# Allegro board fpga_pci_card.brd
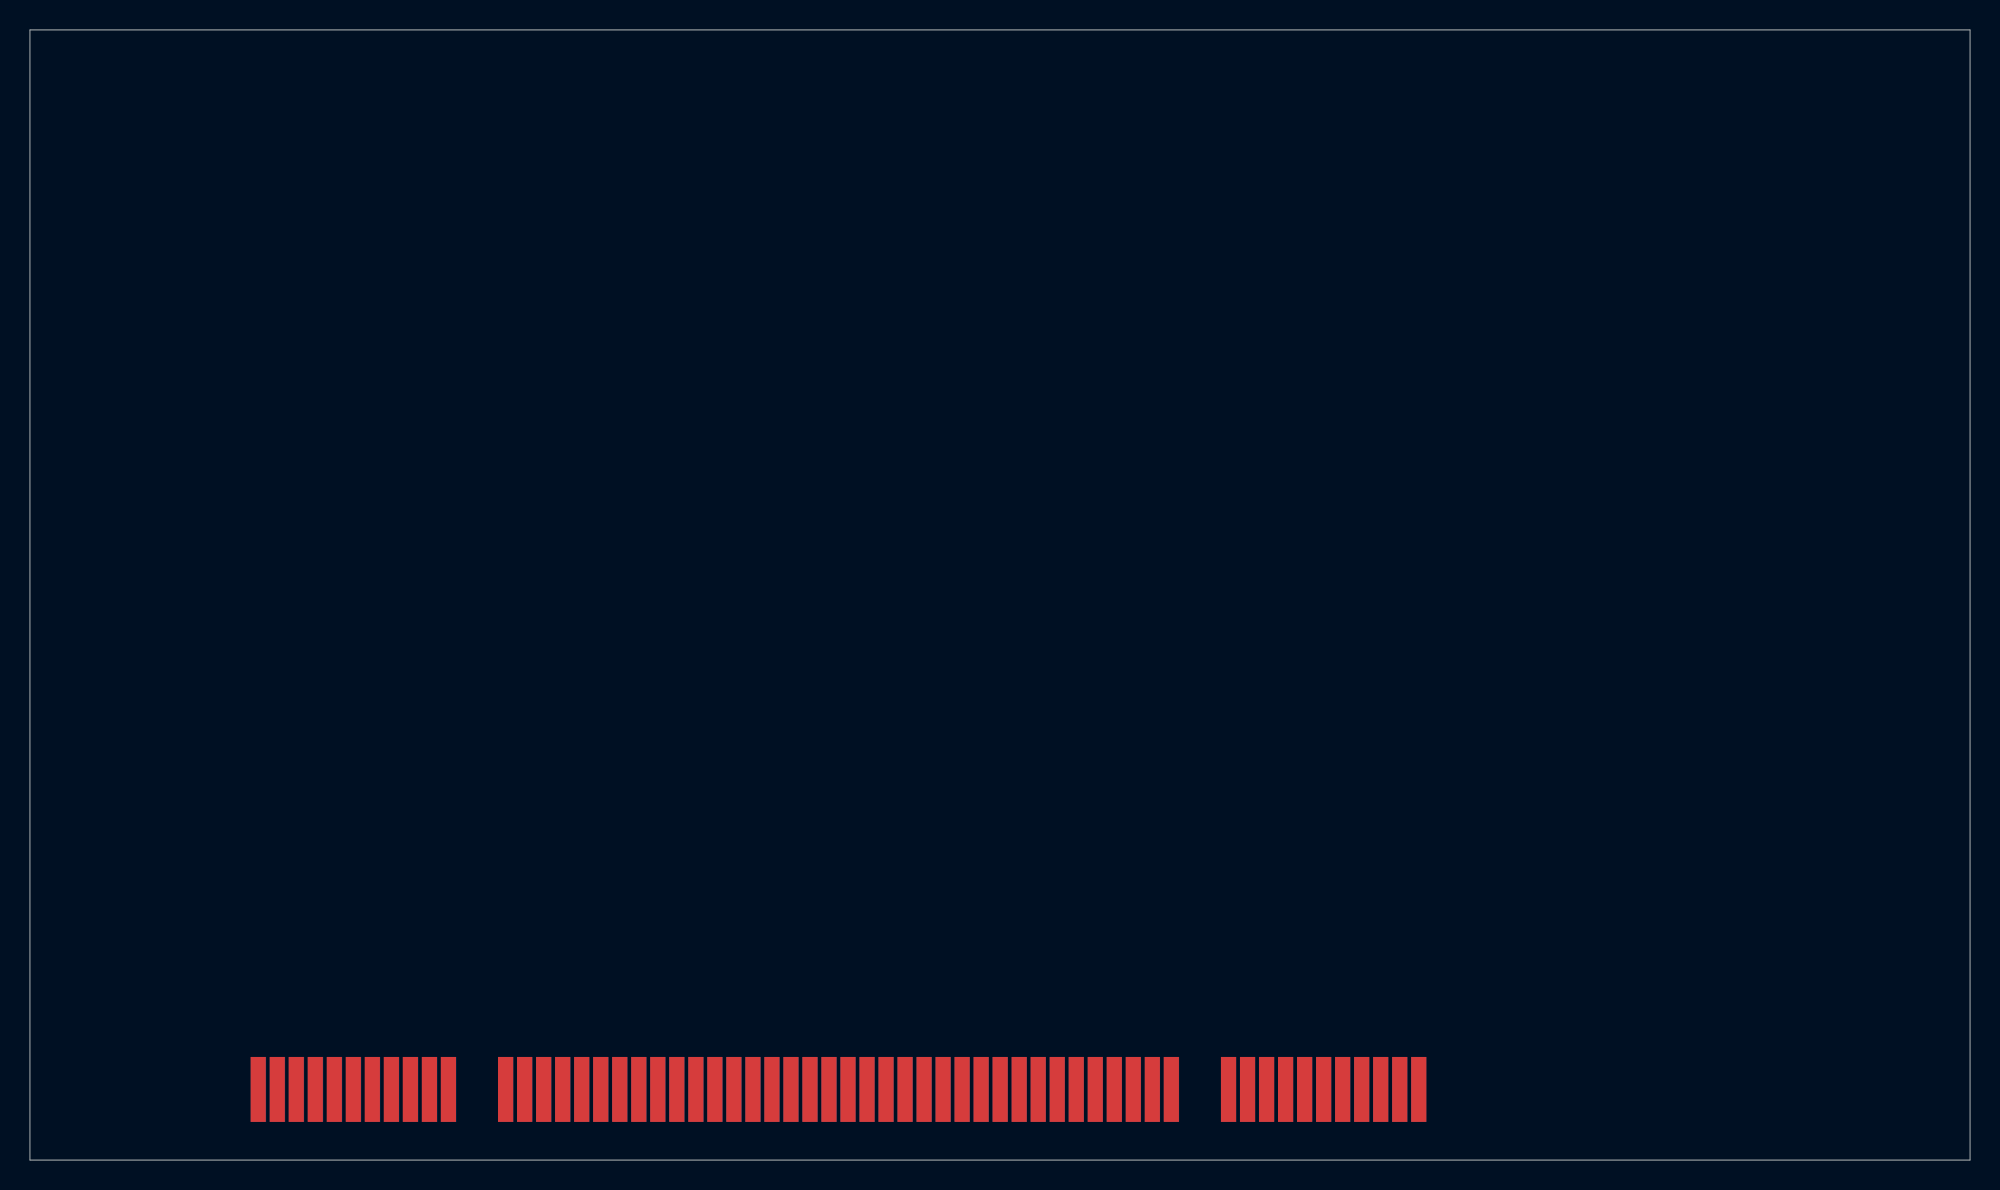
[diagram p0: board, top side]
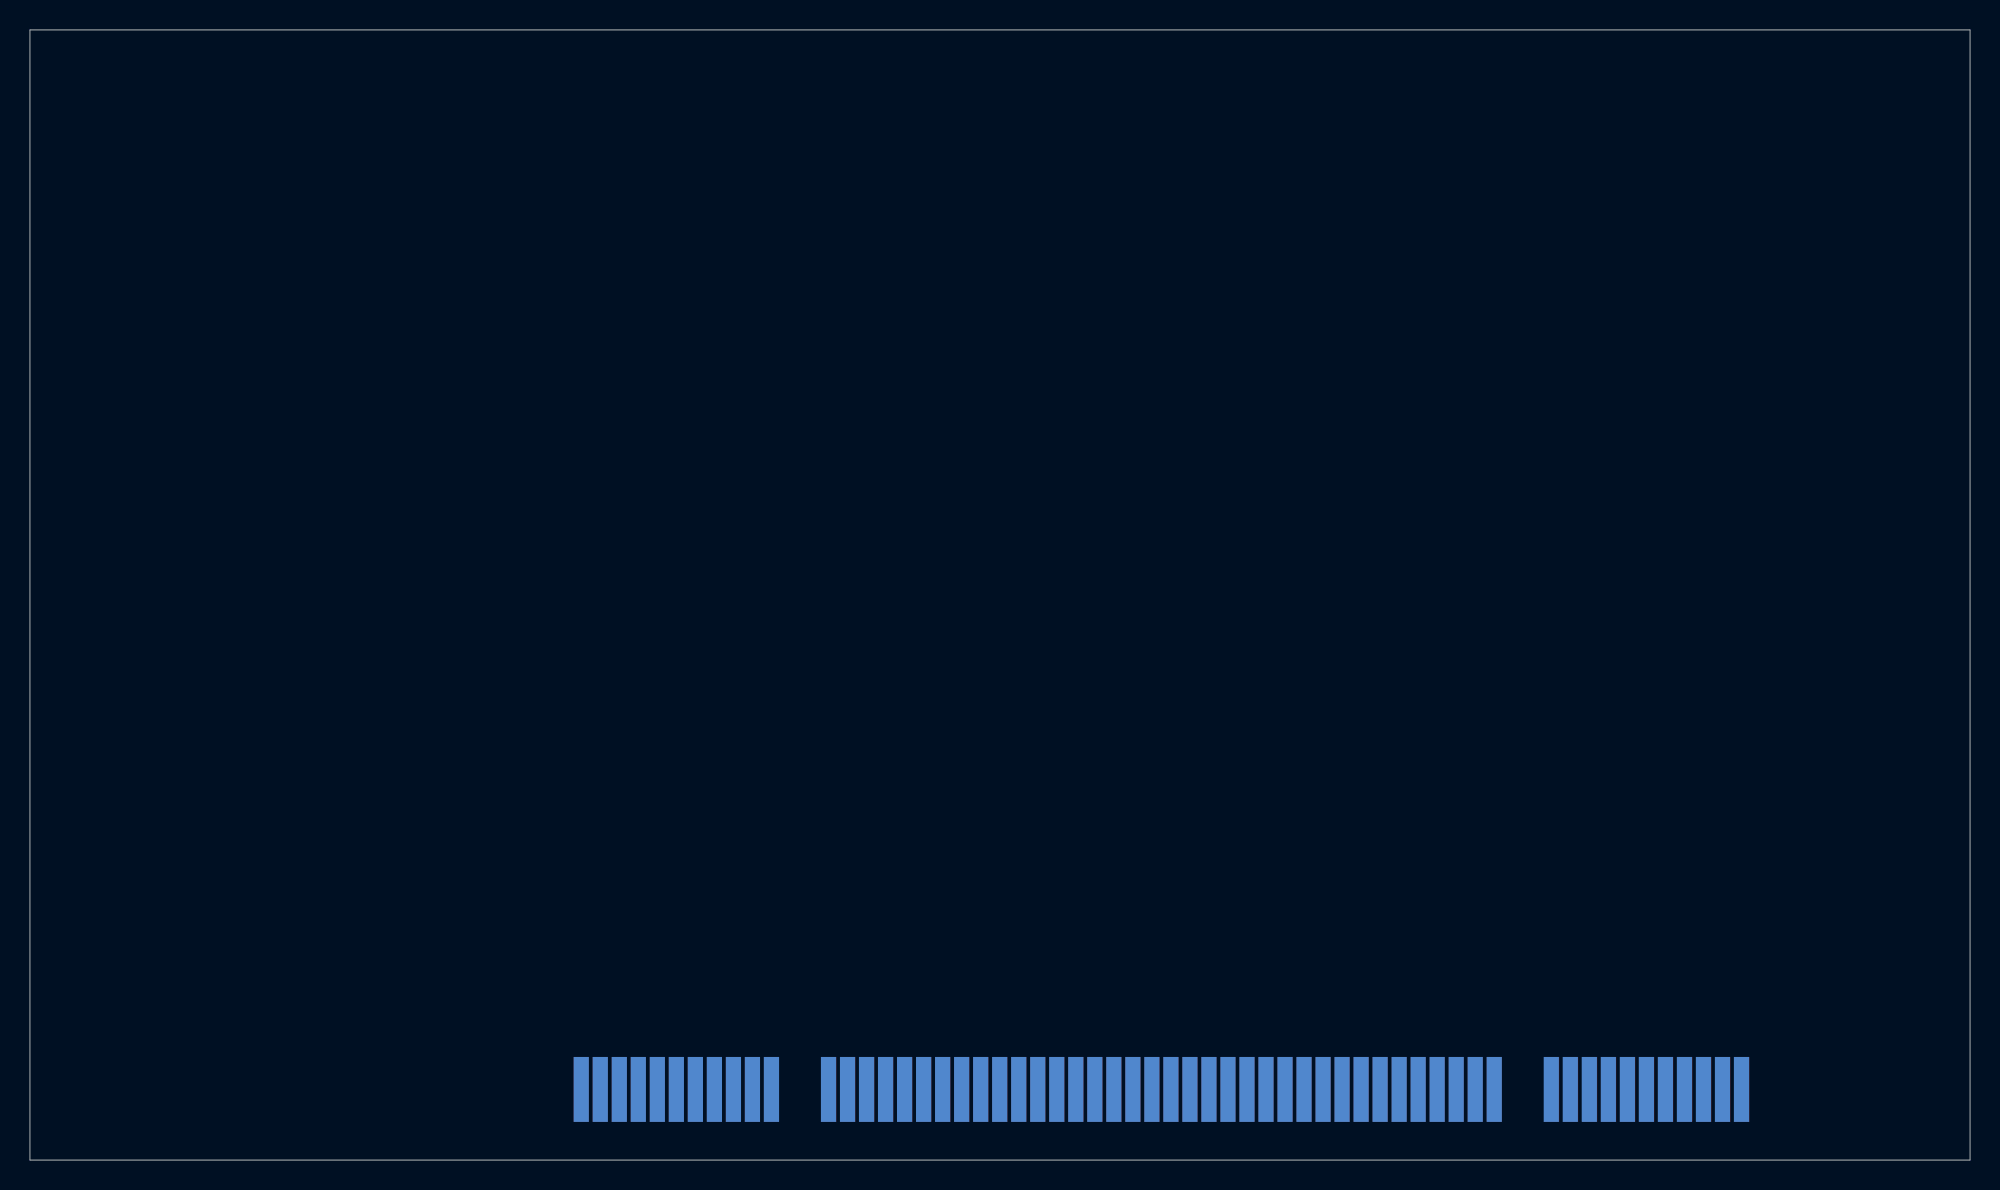
[diagram p1: board, bottom side, seen from below]

Outline 129.54 x 75.52 mm; copper layers: TOP, BOTTOM. Coordinates in mm from the lower left corner of the outline.
Outline path: 0,75.52 129.54,75.52 129.54,0 0,0 0,75.52

## Placement (name value [footprint] x y rotation side)
J5  PCI 32 Bottom Edge  [PCI_32_EDGE_BOTTOM]  15.26 4.72 0 bottom
J6  PCI 32 Top Edge  [PCI_32_EDGE_TOP]  15.26 4.72 0 top

## Library data of the parts
J5 = PCI 32 Bottom Edge
J6 = PCI 32 Top Edge

## Footprints (pads in the part's own frame, mm; a bottom-side part is the same pattern mirrored in y, then rotated)
PCI_32_EDGE_BOTTOM
  rect 1.016x4.34 smd: A1(0,0) A2(1.27,0) A3(2.54,0) A4(3.81,0) A5(5.08,0) A6(6.35,0) A7(7.62,0) A8(8.89,0) A9(10.16,0) A10(11.43,0) A11(12.7,0) A14(16.51,0) A15(17.78,0) A16(19.05,0) A17(20.32,0) A18(21.59,0) A19(22.86,0) A20(24.13,0) A21(25.4,0) A22(26.67,0) A23(27.94,0) A24(29.21,0) A25(30.48,0) A26(31.75,0) A27(33.02,0) A28(34.29,0) A29(35.56,0) A30(36.83,0) A31(38.1,0) A32(39.37,0) A33(40.64,0) A34(41.91,0) A35(43.18,0) A36(44.45,0) A37(45.72,0) A38(46.99,0) A39(48.26,0) A40(49.53,0) A41(50.8,0) A42(52.07,0) A43(53.34,0) A44(54.61,0) A45(55.88,0) A46(57.15,0) A47(58.42,0) A48(59.69,0) A49(60.96,0) A52(64.77,0) A53(66.04,0) A54(67.31,0) A55(68.58,0) A56(69.85,0) A57(71.12,0) A58(72.39,0) A59(73.66,0) A60(74.93,0) A61(76.2,0) A62(77.47,0)
PCI_32_EDGE_TOP
  rect 1.016x4.34 smd: B1(-0.02,0) B2(1.25,0) B3(2.52,0) B4(3.79,0) B5(5.06,0) B6(6.33,0) B7(7.6,0) B8(8.87,0) B9(10.14,0) B10(11.41,0) B11(12.68,0) B14(16.5,0) B15(17.77,0) B16(19.04,0) B17(20.31,0) B18(21.58,0) B19(22.85,0) B20(24.12,0) B21(25.39,0) B22(26.66,0) B23(27.93,0) B24(29.2,0) B25(30.47,0) B26(31.74,0) B27(33.01,0) B28(34.28,0) B29(35.55,0) B30(36.82,0) B31(38.09,0) B32(39.36,0) B33(40.63,0) B34(41.9,0) B35(43.17,0) B36(44.44,0) B37(45.71,0) B38(46.98,0) B39(48.25,0) B40(49.52,0) B41(50.79,0) B42(52.06,0) B43(53.33,0) B44(54.6,0) B45(55.87,0) B46(57.14,0) B47(58.41,0) B48(59.68,0) B49(60.95,0) B52(64.77,0) B53(66.04,0) B54(67.31,0) B55(68.58,0) B56(69.85,0) B57(71.12,0) B58(72.39,0) B59(73.66,0) B60(74.93,0) B61(76.2,0) B62(77.47,0)

## Nets
GND: J5.A18(GND08) J5.A24(GND10) J5.A30(GND12) J5.A35(GND14) J5.A37(GND15) J5.A42(GND17) J5.A48(GND19) J5.A56(GND21) J6.B3(GND) J6.B9(PRSNT1) J6.B11(PRSNT2) J6.B15(GND _B15) J6.B17(GND _B17) J6.B22(GND _B22) J6.B28(GND _B28) J6.B34(GND13) J6.B38(GND16) J6.B46(GND18) J6.B49(GND20) J6.B57(GND22)
VCC: J5.A2(+12V _A2) J5.A5(+5V _A5) J5.A8(+5V _A8) J5.A10(+5V _A10) J5.A16(+5V _A16) J5.A21(+3.3V01) J5.A27(+3.3V03) J5.A33(+3.3V05) J5.A39(+3.3V07) J5.A45(+3.3V10) J5.A53(+3.3V11) J5.A59(+5V _A59) J5.A61(VCC11) J5.A62(VCC13) J6.B5(+5V _B5) J6.B6(+5V _B6) J6.B19(+5V _B19) J6.B25(+3.3V _B25) J6.B31(+3.3V _B31) J6.B36(+3.3V06) J6.B41(+3.3V08) J6.B43(+3.3V09) J6.B54(+3.3V12) J6.B59(VCC08) J6.B61(VCC10) J6.B62(VCC12)
FPGA_JTAG_TCK: J6.B2(TCK) J6.B4(TDO) J6.B7(INTB) J6.B8(INTD) J6.B52(AD8) J6.B53(AD7) J6.B55(AD5) J6.B56(AD3) J6.B58(AD1) J6.B60(ACK64)
FPGA_JTAG_TDI: J5.A3(TMS) J5.A4(TDI) J5.A6(INTA) J5.A7(INTC) J5.A52(C/BE0) J5.A54(AD6) J5.A55(AD4) J5.A57(AD2) J5.A58(AD0) J5.A60(REQ64)
PCI_AD9: J5.A49(AD9)
PCI_AD10: J6.B48(AD10)
PCI_AD11: J5.A47(AD11)
PCI_AD12: J6.B47(AD12)
PCI_AD13: J5.A46(AD13)
PCI_AD14: J6.B45(AD14)
PCI_AD15: J5.A44(AD15)
PCI_AD16: J5.A32(AD16)
PCI_AD17: J6.B32(AD17)
PCI_AD18: J5.A31(AD18)
PCI_AD19: J6.B30(AD19)
PCI_AD20: J5.A29(AD20)
PCI_AD21: J6.B29(AD21)
PCI_AD22: J5.A28(AD22)
PCI_AD23: J6.B27(AD23)
PCI_AD24: J5.A25(AD24)
PCI_AD25: J6.B24(AD25)
PCI_AD26: J5.A23(AD26)
PCI_AD27: J6.B23(AD27)
PCI_AD28: J5.A22(AD28)
PCI_AD29: J6.B21(AD29)
PCI_AD30: J5.A20(AD30)
PCI_AD31: J6.B20(AD31)
PCI_C/BE1: J6.B44(C/BE1)
PCI_C/BE2: J6.B33(C/BE2)
PCI_C/BE3: J6.B26(C/BE3)
PCI_CLK: J6.B16(CLK)
PCI_DEVSEL: J6.B37(DEVSEL)
PCI_FRAME: J5.A34(FRAME)
PCI_GNT: J5.A17(GNT)
PCI_IDSEL: J5.A26(IDSEL)
PCI_IRDY: J6.B35(IRDY#)
PCI_LOCK: J6.B39(LOCK#)
PCI_PAR: J5.A43(PAR)
PCI_PERR: J6.B40(PERR#)
PCI_PME: J5.A19(PME#)
PCI_REQ: J6.B18(REQ)
PCI_SERR: J6.B42(SERR#)
PCI_TRDY: J5.A36(TRDY#)
STOP: J5.A38(STOP)
N82948: J5.A15(RESET)
N83360: J5.A14(3.3VAUX _A14)

Pads without a net: J5 A1 A9 A11 A40 A41; J6 B1 B10 B14
